# Altium PCB Kontrollerkort.PcbDoc
Units mm, origin at the board's own origin, x right, y up, seen from the top; angles counter-clockwise.
Board outline 42 x 48 mm, 2 copper layers (Top Layer, Bottom Layer); 36 components, 48 nets, 179 pads, 35 vias.
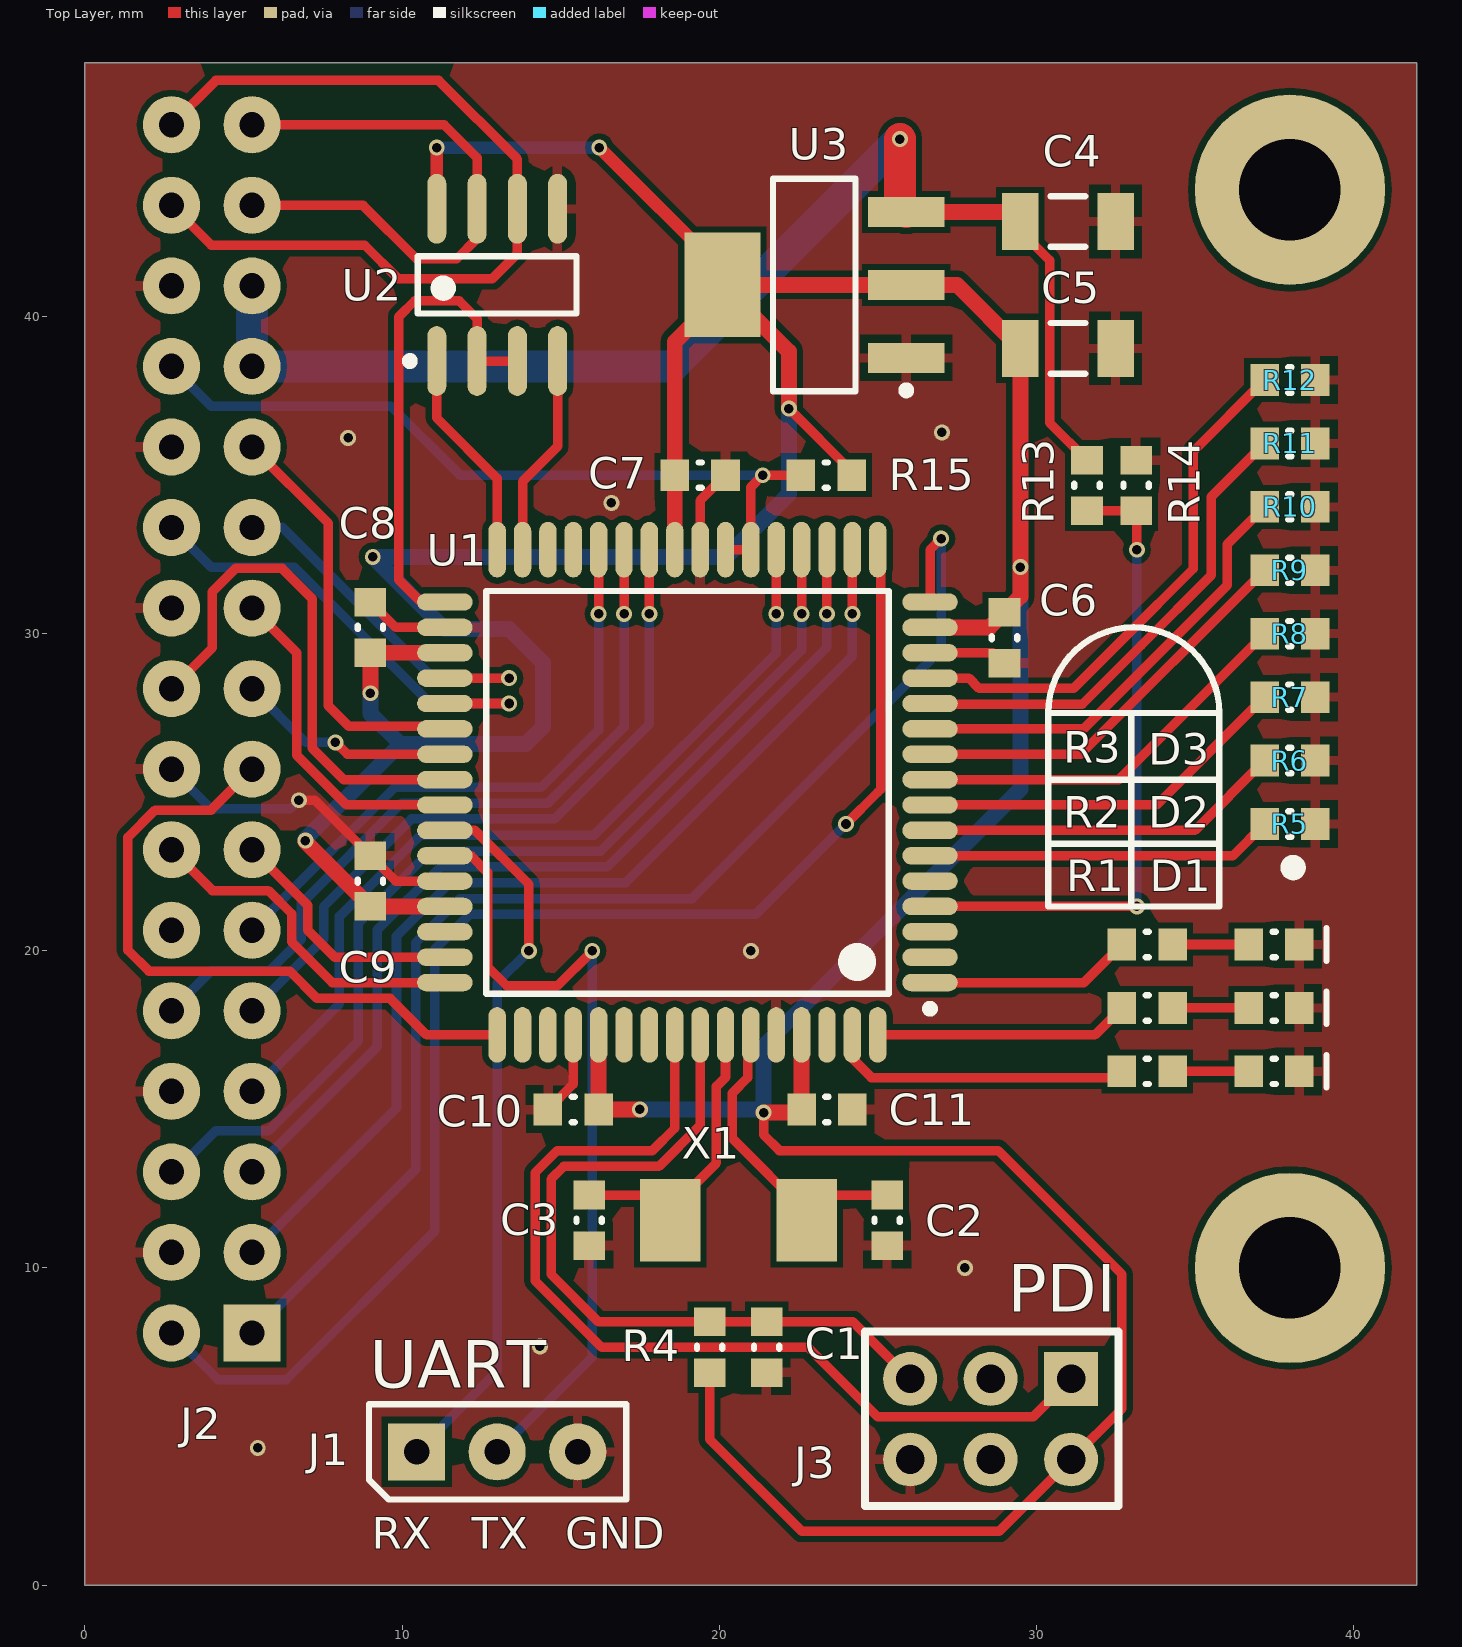
[diagram p0: Top Layer view]
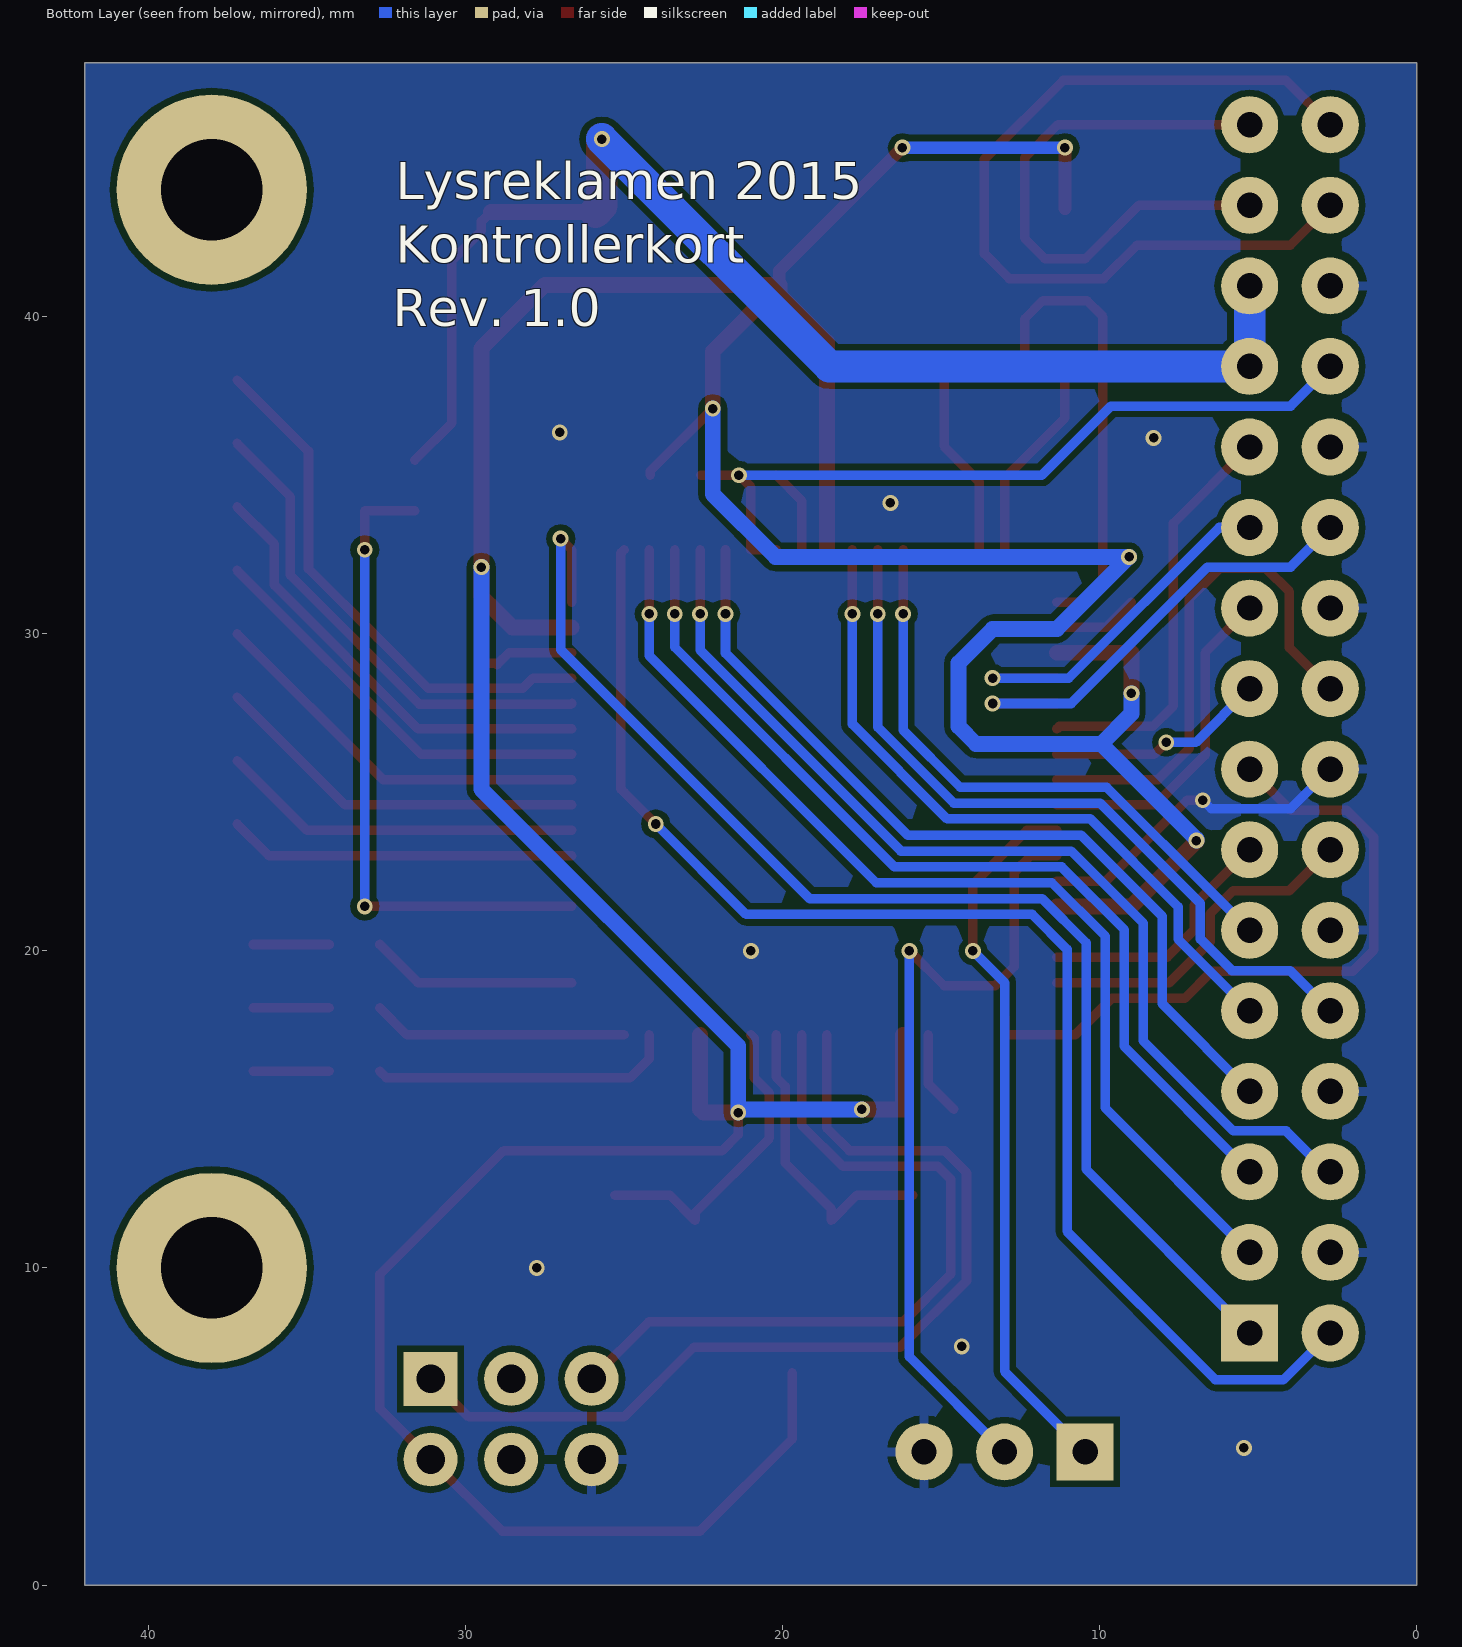
[diagram p1: Bottom Layer view, seen from below]

## Layer stack, top to bottom
Top Solder: solder mask 0.0102, Solder Resist, Dk 3.5
Top Layer: signal copper 0.0356
Dielectric 1: dielectric 0.32, FR-4, Dk 4.8
Bottom Layer: signal copper 0.0356
Bottom Solder: solder mask 0.0102, Solder Resist, Dk 3.5

## Board outline
0,0 0,48 42,48 42,0

## Design rules (kind name [scope] priority, off if disabled: settings)
Clearance [All] p1: gap=0.2 except(0: Arc-Text Track-Text SMDPad-Text THPad-Text Via-Text Fill-Text Poly-Text Region-Text Text-Text)
Height [All] p1: minheight=0 maxheight=200 prefheight=12.7
HoleSize [All] p1: absolutevalues=TRUE maxlimit=6.35 minlimit=0.3 maxpercent=80.000 minpercent=20.000
MinimumSolderMaskSliver [All] p1: minsoldermaskwidth=0.1
PlaneClearance [All] p1: clearance=1
PlaneConnect [All] p1: planeconnectstyle=Relief reliefexpansion=0.508 reliefentries=4 reliefconductorwidth=1 reliefairgap=0.254
PolygonConnect GND_VIA [(InNet('GND') AND IsVia)] p1: connectstyle=Direct reliefconductorwidth=0.254 reliefentries=4 polygonreliefangle="90 Angle" airgapwidth=0.254
PolygonConnect [All] p2: connectstyle=Relief reliefconductorwidth=0.3 reliefentries=4 polygonreliefangle="90 Angle" airgapwidth=0.254
RoutingVias [All] p1: holewidth=0.3 width=0.8 viastyle="Through Hole" minholewidth=0.3 minwidth=0.4 maxholewidth=6.35 maxwidth=8
SilkToSolderMaskClearance [IsPad] p1: minsilkscreentomaskgap=0.178 clearancetoexposedcopper=TRUE
SolderMaskExpansion [All] p1: expansion=0.06 useseparateexpansions=TRUE expansionbottom=0.08
Width [All] p1: maxlimit=10 minlimit=0.16 preferedwidth=0.4
24 further rules are at their usual default settings.

## Components (designator, comment, footprint, x,y, rotation, side; value= is the part's Value field where it differs from the comment)
C1 "100nF(0603)" CAPC0603(1608)55_N 21.5,7.5 r90 top
C2 "8.2pF(0603)" CAPC0603(1608)55_N 25.3,11.5 r90 top
C3 "8.2pF(0603)" CAPC0603(1608)55_N 15.9,11.5 r90 top
C4 "22uF(1206)" CAPC1206(3216)170_N 31,43 r180 top
C5 "22uF(1206)" CAPC1206(3216)170_N 31,39 r180 top
C6 "100nF(0603)" CAPC0603(1608)55_N 29,29.875 r90 top
C7 "100nF(0603)" CAPC0603(1608)55_N 19.4,35 r180 top
C8 "100nF(0603)" CAPC0603(1608)55_N 9,30.2 r270 top
C9 "100nF(0603)" CAPC0603(1608)55_N 9,22.2 r270 top
C10 "100nF(0603)" CAPC0603(1608)55_N 15.4,15 r0 top
C11 "100nF(0603)" CAPC0603(1608)55_N 23.4,15 r180 top
D1 "SMD LED Red" I_LEDC0603(1608)_N 37.5,16.2 r0 top
D2 "SMD LED Red" I_LEDC0603(1608)_N 37.5,18.2 r0 top
D3 "SMD LED Red" I_LEDC0603(1608)_N 37.5,20.2 r0 top
J1 "Header1x3" HDRV3W64P254_1X3_762X254X900B 13,4.2 r90 top
J2 "Lysreklameparalellbusskontakt2015" HDRRA32W64P254_2X16_4064X1260X600B 4,27 r180 top
J3 "PDI Header" HEADER_3x2 31.1,6.5 r180 top
R1 "120(0603)" RESC0603(1608)_N 33.5,16.2 r0 top
R2 "120(0603)" RESC0603(1608)_N 33.5,18.2 r0 top
R3 "120(0603)" RESC0603(1608)_N 33.5,20.2 r0 top
R4 "10k(0603)" RESC0603(1608)_N 19.7,7.5 r270 top
R5 "0R(0603)" RESC0603(1608)_N 38,24 r0 top
R6 "0R(0603)" RESC0603(1608)_N 38,26 r0 top
R7 "0R(0603)" RESC0603(1608)_N 38,28 r0 top
R8 "0R(0603)" RESC0603(1608)_N 38,30 r0 top
R9 "0R(0603)" RESC0603(1608)_N 38,32 r0 top
R10 "0R(0603)" RESC0603(1608)_N 38,34 r0 top
R11 "0R(0603)" RESC0603(1608)_N 38,36 r0 top
R12 "0R(0603)" RESC0603(1608)_N 38,38 r0 top
R13 "1k(0603)" RESC0603(1608)_N 31.6,34.675 r90 top
R14 "10k(0603)" RESC0603(1608)_N 33.15,34.675 r270 top
R15 "1k(0603)" RESC0603(1608)_N 23.375,35 r0 top
U1 "AVR ATXMEGA64A3U-AU" TQFP64 19,25 r180 top
U2 "MAX3483" SOIC-8-WIDE 13,41 r90 top
U3 "TLV1117" SOT230P700X180-4N 23,41 r180 top
X1 "NX5032GA-16" CRYSTAL-ABM7 20.6,11.5 r180 top

## Footprints (in the part's own frame and the unit in brackets; to place one, negate y for a bottom-side part, rotate by r counter-clockwise, add the part's x,y. Pads: shape width x height; smd on the part's side, far side on the other; paste and mask are expansions set on the pad)
CAPC0603(1608)55_N [mm] "Chip Capacitor, Body 1.6x0.8mm, Height 0.55mm, IPC Medium Density"
  rect 0.9x1 smd: 1(-0.8,0) 2(0.8,0)
  silkscreen extent -0.05,-0.4 0.05,0.4, body extent -0.87,-0.48 0.88,0.47, height 0.55
CAPC1206(3216)170_N [mm] "Chip Capacitor, Body 3.2x1.6mm, Height 1.7mm, IPC Medium Density"
  rect 1.15x1.8 smd: 1(-1.5,0) 2(1.5,0)
  silkscreen extent -0.55,-0.8 0.55,0.8, body extent -1.7,-0.9 1.7,0.9, height 1.7
CRYSTAL-ABM7 [mm]
  rect 1.9x2.6 smd: 1(-2.159,0) 2(2.141,0)
  body extent -3.05,-1.75 3.05,1.75, height 1.44
HDRRA32W64P254_2X16_4064X1260X600B [mm] "Header Right Angle 2x16"
  rect 1.8x1.8 hole 0.8: 1(-1.27,19.05)
  round 1.8 hole 0.8: 2(1.27,19.05) 3(-1.27,16.51) 4(1.27,16.51) 5(-1.27,13.97) 6(1.27,13.97) 7(-1.27,11.43) 8(1.27,11.43) 9(-1.27,8.89) 10(1.27,8.89) 11(-1.27,6.35) 12(1.27,6.35) 13(-1.27,3.81) 14(1.27,3.81) 15(-1.27,1.27) 16(1.27,1.27) 17(-1.27,-1.27) 18(1.27,-1.27) 19(-1.27,-3.81) 20(1.27,-3.81) 21(-1.27,-6.35) 22(1.27,-6.35) 23(-1.27,-8.89) 24(1.27,-8.89) 25(-1.27,-11.43) 26(1.27,-11.43) 27(-1.27,-13.97) 28(1.27,-13.97) 29(-1.27,-16.51) 30(1.27,-16.51) 31(-1.27,-19.05) 32(1.27,-19.05)
  body extent -1.6,-20.12 11.03,20.12, height 5.79
HDRV3W64P254_1X3_762X254X900B [mm] "Header 1x3"
  rect 1.8x1.8 hole 0.8: 1(0,2.54)
  round 1.8 hole 0.8: 2(0,0) 3(0,-2.54)
  silkscreen extent -1.5,-4.07 1.5,4.04
HEADER_3x2 [mm]
  rect 1.7x1.7 hole 0.9: 1(0,0)
  round 1.7 hole 0.9: 2(0,2.54) 3(2.54,0) 4(2.54,2.54) 5(5.08,0) 6(5.08,2.54)
  silkscreen extent -1.5,-1.5 6.5,4, body extent -1.27,-1.27 6.35,3.81, height 8.45
I_LEDC0603(1608)_N [mm] "Chip Resistor, Body 1.6x0.8mm, IPC Medium Density"
  rect 0.9x1 smd: 1(-0.8,0) 2(0.8,0)
  silkscreen extent -0.05,-0.51 1.65,0.51, body extent -0.85,-0.45 0.85,0.45, height 0.9
RESC0603(1608)_N [mm] "Chip Resistor, Body 1.6x0.8mm, IPC Medium Density"
  rect 0.9x1 smd: 1(-0.8,0) 2(0.8,0)
  silkscreen extent -0.05,-0.4 0.05,0.4, body extent -0.85,-0.47 0.85,0.47, height 0.6
SOIC-8-WIDE [mm] "SOIC, 8-Leads, Body 4.9x3.9mm, Pitch 1.27mm, IPC Medium Density"
  oval 2.2x0.6 smd: 1(-2.4,1.905) 2(-2.4,0.635) 3(-2.4,-0.635) 4(-2.4,-1.905) 5(2.4,-1.905) 6(2.4,-0.635) 7(2.4,0.635) 8(2.4,1.905)
  silkscreen extent -2.52,-2.5 0.9,2.88, body extent -3,-2.5 3.2,2.5, height 1.75
SOT230P700X180-4N [mm] "SOT223, 4-Leads, Body 6,7x7,3mm (max), Pitch 2,30mm, IPC Medium Density"
  rect 2.4x0.95 smd: 1(-2.9,2.3) 2(-2.9,0) 3(-2.9,-2.3)
  rect 2.4x3.3 smd: 4(2.9,0)
  silkscreen extent -3.03,-3.35 1.3,3.45, body extent -3.1,-3.31 3.83,3.19, height 1.59
TQFP64 [mm] "Thin QFP, 64-Leads, Body 14x14mm, Pitch 0.8mm, IPC Medium Density"
  oval 1.75x0.55 smd: 1(-7.65,6) 2(-7.65,5.2) 3(-7.65,4.4) 4(-7.65,3.6) 5(-7.65,2.8) 6(-7.65,2) 7(-7.65,1.2) 8(-7.65,0.4) 9(-7.65,-0.4) 10(-7.65,-1.2) 11(-7.65,-2) 12(-7.65,-2.8) 13(-7.65,-3.6) 14(-7.65,-4.4) 15(-7.65,-5.2) 16(-7.65,-6) 33(7.65,-6) 34(7.65,-5.2) 35(7.65,-4.4) 36(7.65,-3.6) 37(7.65,-2.8) 38(7.65,-2) 39(7.65,-1.2) 40(7.65,-0.4) 41(7.65,0.4) 42(7.65,1.2) 43(7.65,2) 44(7.65,2.8) 45(7.65,3.6) 46(7.65,4.4) 47(7.65,5.2) 48(7.65,6)
  oval 0.55x1.75 smd: 17(-6,-7.65) 18(-5.2,-7.65) 19(-4.4,-7.65) 20(-3.6,-7.65) 21(-2.8,-7.65) 22(-2,-7.65) 23(-1.2,-7.65) 24(-0.4,-7.65) 25(0.4,-7.65) 26(1.2,-7.65) 27(2,-7.65) 28(2.8,-7.65) 29(3.6,-7.65) 30(4.4,-7.65) 31(5.2,-7.65) 32(6,-7.65) 49(6,7.65) 50(5.2,7.65) 51(4.4,7.65) 52(3.6,7.65) 53(2.8,7.65) 54(2,7.65) 55(1.2,7.65) 56(0.4,7.65) 57(-0.4,7.65) 58(-1.2,7.65) 59(-2,7.65) 60(-2.8,7.65) 61(-3.6,7.65) 62(-4.4,7.65) 63(-5.2,7.65) 64(-6,7.65)
  silkscreen extent -7.78,-6.35 6.35,6.95, body extent -7,-7 7,7, height 1.6

## Part data
C1 C6 C7 C8 C9 C10 C11: "100nF 0603 5% X7R 50V"
C2 C3: "0603 5% NP0 50V"
C4 C5: "1206 10% Tantalum 10V"
D1 D2 D3: "SMD"
J1: library part "Header 1x3", "2,54mm pitch"
J3: library part PDI-HEADER, "PDI Xmega programming header"
R1 R2 R3: library part 3050, "120R 0603 0.1W 1% Thick film resistor"
R4 R14: library part 2444, "10k 0603 0.1W 1% Thick film resistor"
R5 R6 R7 R8 R9 R10 R11 R12: library part 3186, "0.1W 1% Thick film resistor"
R13 R15: library part 3029, "0603 0.1W 1% Thick film resistor"
U1: "Mikrokontroller"
U2: "3.3V-Powered, 10Mbps and Slew-Rate-Limited True RS-485/RS-422 Transceivers"
U3: "3,3V Low dropout regulator"
X1: "Crystal 16 MHz"

## Free pads (board coordinates)
  round 6 hole 3.2 unplated: 0(38,10) 0(38,44)

## Via types
v1: diameter 0.5, hole 0.3, Top Layer to Bottom Layer, 35 vias

## Nets (pads, with @x,y where several pads share a name; then routed paths per layer and width w, separated by ;. In a path a pad name is that pad's centre, name@x,y a point inside that pad or via, vN(x,y) a via of type N, cw(c..) or ccw(c..) an arc to the next point about the centre after c; other vN are vias at no path point)
BOKS_ID: J2.26 R15.1 U1.22 U1.23 | length 24.6
  Top Layer w0.3: U1.23 U1.22 21,34.625 v1(21.375,35) R15.1
  Bottom Layer w0.3: J2.26 3.98,37.18 9.645,37.18 11.825,35 v1(21.375,35)
DEBUG_LED_1: R1.1 U1.63 | length 9.6
  Top Layer w0.3: U1.63 24.2,16.6 24.8,16 32.5,16 R1.1
DEBUG_LED_2: R2.1 U1.64 | length 8.1
  Top Layer w0.3: U1.64 31.85,17.35 R2.1
DEBUG_LED_3: R3.1 U1.1 | length 6.5
  Top Layer w0.3: U1.1 31.5,19 R3.1
DMX+: J2.30 J2.32 U2.6 | length 27.7
  Top Layer w0.3: J2.30 3.99,42.25 8.825,42.25 9.875,41.2 12.85,41.2 13.635,41.985 U2.6 13.635,44.965 11.15,47.45 4.13,47.45 J2.32
DMX-: J2.29 J2.31 U2.7 | length 18.1
  Top Layer w0.3: J2.29 8.772,43.51 10.457,41.825 11.725,41.825 12.365,42.465 U2.7 12.365,45.01 11.325,46.05 J2.31
DMX_DE: U1.33 U2.2 U2.3 | length 15.6
  Top Layer w0.3: U1.33 10.6,31 9.9,31.7 9.9,40 10.4,40.5 11.8,40.5 12.365,39.935 U2.2 U2.3
DMX_DI: U1.31 U2.4 | length 6.4
  Top Layer w0.3: U1.31 13.8,34.8 14.905,35.905 U2.4
DMX_RD: U1.32 U2.1 | length 6.7
  Top Layer w0.3: U2.1 11.095,36.805 13,34.9 U1.32
GND: C1.1 C2.1 C3.1 C4.1 C5.1 C6.1 C7.1 C8.1 C9.1 C10.1 C11.1 D1.2 D2.2 D3.2 J1.3 J2.4 J2.8 J2.12 J2.16 J2.20 J2.24 J2.28 J3.6 R5.2 R6.2 R7.2 R8.2 R9.2 R10.2 R11.2 R12.2 R14.1 U1.14 U1.24 U1.34 U1.44 U1.52 U1.60 U2.5 U3.1 | length 21.1
  Top Layer w0.3: v1(6.75,24.75) 7.25,24.75 C9.1 9.8,22.2 U1.44 ; C8.1 9.8,30.2 U1.34 ; C10.1 15.4,15.8 U1.52 ; U1.24 19.4,34.2 C7.1 ; U1.14 28.625,29.4 C6.1@29,29.025 ; C6.1 C6.1@29.275,29.075
  Bottom Layer w0.3: J2.16 3.98,24.48 6.48,24.48 v1(6.75,24.75)
  other v1: 5.45,4.325 14.35,7.525 27.75,10 21,20 16.6,34.125 8.3,36.175 27.025,36.35
KANAL_1-1: J2.1 U1.16 | length 40.5
  Top Layer w0.3: U1.16 26.65,32.65 v1(27,33)
  Bottom Layer w0.3: J2.1 10.425,13.105 10.425,20.255 11.818,21.648 19.148,21.648 27,29.5 v1(27,33)
KANAL_1-2: J2.2 U1.17 | length 43.5
  Top Layer w0.3: v1(24,24) 25,25 25.1,25.1 25.1,32.55 U1.17
  Bottom Layer w0.3: J2.2 4.205,6.475 6.35,6.475 11.025,11.15 11.025,20.048 12.125,21.148 21.148,21.148 v1(24,24)
KANAL_1-3: J2.3 U1.18 | length 33.2
  Top Layer w0.3: v1(24.2,30.625) U1.18
  Bottom Layer w0.3: J2.3 9.825,15.045 9.825,20.462 11.511,22.148 17.048,22.148 24.2,29.3 v1(24.2,30.625)
KANAL_2-1: J2.5 U1.19 | length 30.2
  Top Layer w0.3: v1(23.4,30.625) U1.19
  Bottom Layer w0.3: J2.5 9.225,16.985 9.225,20.669 11.203,22.648 16.473,22.648 23.4,29.575 v1(23.4,30.625)
KANAL_2-2: J2.6 U1.20 | length 31.9
  Top Layer w0.3: v1(22.6,30.625) U1.20
  Bottom Layer w0.3: J2.6@2.83,13.03 4.12,14.32 5.788,14.32 8.625,17.157 8.625,20.877 10.896,23.148 16.266,23.148 22.6,29.482 v1(22.6,30.625)
KANAL_2-3: J2.7 U1.21 | length 27.2
  Top Layer w0.3: v1(21.8,30.625) 21.725,30.625 21.8,30.7 U1.21
  Bottom Layer w0.3: J2.7 8.025,18.325 8.025,21.084 10.589,23.648 16.059,23.648 21.8,29.389 v1(21.8,30.625)
KANAL_3-1: J2.9 U1.26 | length 22.4
  Top Layer w0.3: v1(17.8,30.625) U1.26
  Bottom Layer w0.3: J2.9 7.525,20.365 7.525,21.391 10.294,24.16 14.811,24.16 17.8,27.149 v1(17.8,30.625)
KANAL_3-2: J2.10 U1.27 | length 24.2
  Top Layer w0.3: v1(17,30.625) U1.27
  Bottom Layer w0.3: J2.10 3.995,19.375 5.828,19.375 6.825,20.372 6.825,21.498 9.987,24.66 14.604,24.66 17,27.057 v1(17,30.625)
KANAL_3-3: J2.11 U1.28 | length 19.2
  Top Layer w0.3: v1(16.2,30.625) U1.28
  Bottom Layer w0.3: J2.11 6.25,21.63 9.78,25.16 14.397,25.16 16.2,26.964 v1(16.2,30.625)
KANAL_4-1: J2.13 U1.47 | length 7.9
  Top Layer w0.3: J2.13 7.02,21.44 7.02,20.655 7.875,19.8 U1.47
KANAL_4-2: J2.14 U1.48 | length 10.9
  Top Layer w0.3: J2.14 4.02,21.9 5.788,21.9 6.52,21.168 6.52,20.28 7.8,19 U1.48
KANAL_4-3: J2.15 U1.49 | length 21.7
  Top Layer w0.3: J2.15 3.98,24.44 2.212,24.44 1.35,23.578 1.35,20.025 2.015,19.36 6.458,19.36 7.318,18.5 9.625,18.5 10.775,17.35 U1.49 U1.49@13,17.9
KANAL_5-1: J2.17 U1.39 | length 6.9
  Top Layer w0.3: v1(7.9,26.575) 8.275,26.2 U1.39
  Bottom Layer w0.3: J2.17 6.965,26.575 v1(7.9,26.575)
KANAL_5-2: J2.18 U1.40 | length 16.7
  Top Layer w0.3: J2.18 4.02,29.56 4.02,31.328 4.752,32.06 6.215,32.06 7.175,31.1 7.175,26.382 8.157,25.4 U1.40
KANAL_5-3: J2.19 U1.41 | length 10.5
  Top Layer w0.3: J2.19 6.675,29.405 6.675,26.175 8.25,24.6 U1.41
KANAL_6-1: J2.21 U1.36 | length 12.1
  Top Layer w0.3: U1.36 v1(13.375,28.6)
  Bottom Layer w0.3: J2.21 6.225,33.35 10.975,28.6 v1(13.375,28.6)
KANAL_6-2: J2.22 U1.37 | length 15
  Top Layer w0.3: U1.37 v1(13.375,27.8)
  Bottom Layer w0.3: J2.22 3.98,32.1 6.6,32.1 10.9,27.8 v1(13.375,27.8)
KANAL_6-3: J2.23 U1.38 | length 13.1
  Top Layer w0.3: J2.23 7.675,33.485 7.675,27.725 8.325,27.075 11.275,27.075 U1.38
NetC1_2: C1.2 J3.5 R4.1 U1.57 | length 23.9
  Top Layer w0.3: U1.57 19.4,14.5 18.1,13.2 15.1,13.2 14.7,12.8 14.7,9.8 16.2,8.3 R4.1 C1.2 24.22,8.3 J3.5
NetC2_2: C2.2 U1.59 X1.1 | length 9.9
  Top Layer w0.3: U1.59 20.9,17.25 20.9,16 20.415,15.515 20.415,14.085 22.759,11.741 X1.1 23.559,12.3 C2.2
NetC3_2: C3.2 U1.58 X1.2 | length 9.5
  Top Layer w0.3: C3.2 17.659,12.3 X1.2 18.459,11.859 19.915,13.315 19.915,15.722 20.2,16.007 U1.58
NetD1_1: D1.1 R1.2 | length 2.4
  Top Layer w0.3: R1.2 D1.1
NetD2_1: D2.1 R2.2 | length 2.4
  Top Layer w0.3: R2.2 D2.1
NetD3_1: D3.1 R3.2 | length 2.4
  Top Layer w0.3: R3.2 D3.1
NetJ3_1: J3.1 U1.56 | length 30.5
  Top Layer w0.3: U1.56 18.6,14.407 17.893,13.7 14.893,13.7 14.2,13.007 14.2,9.593 16.293,7.5 22.8,7.5 25,5.3 29.9,5.3 J3.1
NetR13_1: R13.1 R14.2 U1.4 | length 20.6
  Top Layer w0.3: U1.4 v1(33.175,21.4) ; R13.1 R14.2 33.175,33.875 v1(33.175,32.65)
  Bottom Layer w0.3: v1(33.175,21.4) v1(33.175,32.65)
PB0: R5.1 U1.6 | length 11
  Top Layer w0.3: U1.6 36.2,23 R5.1
PB1: R6.1 U1.7 | length 11.5
  Top Layer w0.3: U1.7 35,23.8 R6.1
PB2: R7.1 U1.8 | length 12
  Top Layer w0.3: U1.8 33.8,24.6 R7.1
PB3: R8.1 U1.9 | length 12.5
  Top Layer w0.3: U1.9 32.6,25.4 R8.1
PB4: R9.1 U1.10 | length 13
  Top Layer w0.3: U1.10 31.4,26.2 R9.1
PB5: R10.1 U1.11 | length 14.2
  Top Layer w0.3: U1.11 31.493,27 36.025,31.532 36.025,32.825 R10.1
PB6: R11.1 U1.12 | length 15.4
  Top Layer w0.3: U1.12 26.675,27.775 31.45,27.775 33.312,29.637 35.525,31.85 35.525,34.325 R11.1
PB7: R12.1 U1.13 | length 16.9
  Top Layer w0.3: U1.13 27.875,28.6 28.2,28.275 31.175,28.275 32.779,29.879 34.95,32.05 34.95,35.75 R12.1
RXD1: J1.1 U1.42 | length 22.7
  Top Layer w0.3: U1.42 12.3,23.8 14,22.1 v1(14,20)
  Bottom Layer w0.3: J1.1 13,6.74 13,19 v1(14,20)
TXD1: J1.2 U1.43 | length 25.6
  Top Layer w0.3: U1.43 12.175,23 12.7,22.475 12.7,19.5 13.3,18.9 14.9,18.9 v1(16,20)
  Bottom Layer w0.3: J1.2 16,7.2 v1(16,20)
VCC_P3V3: C5.2 C6.2 C7.2 C8.2 C9.2 C10.2 C11.2 J3.2 R4.2 R15.2 U1.15 U1.25 U1.35 U1.45 U1.53 U1.61 U2.8 U3.2 U3.4 | length 164
  Top Layer w0.3: R4.2 19.7,4.6 22.6,1.7 28.84,1.7 J3.2 32.7,5.56 32.7,9.8 28.8,13.7 21.9,13.7 21.4,14.2 v1(21.4,14.9) ; v1(22.2,37.1) 24.175,35.125 R15.2
  Top Layer w0.4: U2.8 v1(11.095,45.33) ; v1(16.22,45.33) 20.1,41.45 U3.4
  Top Layer w0.5: v1(6.95,23.475) 6.95,23.45 C9.2 U1.45 ; v1(9,28.125) C8.2 U1.35 ; U1.53 C10.2 v1(17.5,15) ; U1.25 C7.2 18.6,39.2 20.1,40.7 U3.4 ; v1(21.4,14.9) 22.5,14.9 C11.2 U1.61 ; v1(22.2,37.1) 22.2,38.9 U3.4 ; U1.15 28.525,30.2 C6.2 29.5,31.175 v1(29.5,32.1) C5.2 27.5,41 U3.2 U3.4
  Bottom Layer w0.4: v1(11.095,45.33) v1(16.22,45.33)
  Bottom Layer w0.5: v1(6.95,23.475) 6.95,23.525 9.95,26.525 ; v1(9,28.125) 9,27.475 9.95,26.525 ; v1(17.5,15) 21.3,15 v1(21.4,14.9) 21.4,17 29.5,25.1 v1(29.5,32.1) ; v1(22.2,37.1) 22.2,34.4 20.225,32.425 v1(9.075,32.425) 11.35,30.15 13.375,30.15 14.45,29.075 14.45,27.075 13.9,26.525 9.95,26.525
VCC_P5V0: C4.2 J2.25 J2.27 R13.2 U3.3 | length 40.4
  Top Layer w0.3: C4.2@29.2,43.3 C4.2 29.5,42.7 30.425,41.775 30.425,36.65 R13.2
  Top Layer w0.5: U3.3 C4.2@29.2,43.3
  Top Layer w1: v1(25.7,45.6) 25.7,43.5 U3.3
  Bottom Layer w1: J2.27 J2.25 18.53,38.43 v1(25.7,45.6)
pads on no net: J3.3 J3.4 U1.2 U1.3 U1.5 U1.29 U1.30 U1.46 U1.50 U1.51 U1.54 U1.55 U1.62

## Polygon pours and split planes (outlines as drawn)
GND on Top Layer "GND PLANE" (solid, remove dead copper, pour order 2): 0,0 0,48 42,48 42,0
GND on Bottom Layer "GND PLANE" (solid, remove dead copper, pour order 4): 0,0 42,0 42,48 0,48

## Silkscreen, mask and mechanical layers (free items; w line width, h text height)
Top Overlay:
  circle w0.4: c38.1,22.625 r0.2
  lines w0.2: 30.375,26.9 30.375,25.4 35.775,25.4 ; 33,21.4 33,27.5 ; 35.775,23.375 30.375,23.375 30.375,21.4 ; 30.375,21.4 35.775,21.4 35.775,27.5 ; 30.375,21.4 30.375,27.5 ; 30.375,27.5 cw(c33.075,27.5) 35.775,27.5 ; 30.375,27.5 35.775,27.5
  text "PDI" at 29.1,8.625 h1.5
  text "UART" at 8.975,6.225 h1.5
  text "RX" at 9.05,1.15 h1
  text "TX" at 12.2,1.15 h1
  text "GND" at 15.15,1.15 h1
Bottom Overlay:
  text "Lysreklamen 2015" at 32.2,43.3 h2
  text "Kontrollerkort" at 32.2,41.3 h2
  text "Rev. 1.0" at 32.3,39.3 h2
Mechanical 2:
  lines w0.1: 0,-0.05 42.025,-0.05 42.025,48.025 0,48.025 ; 0,0 0,47.975